# EAGLE board lis331_breakout-v10 (EAGLE 6.2)
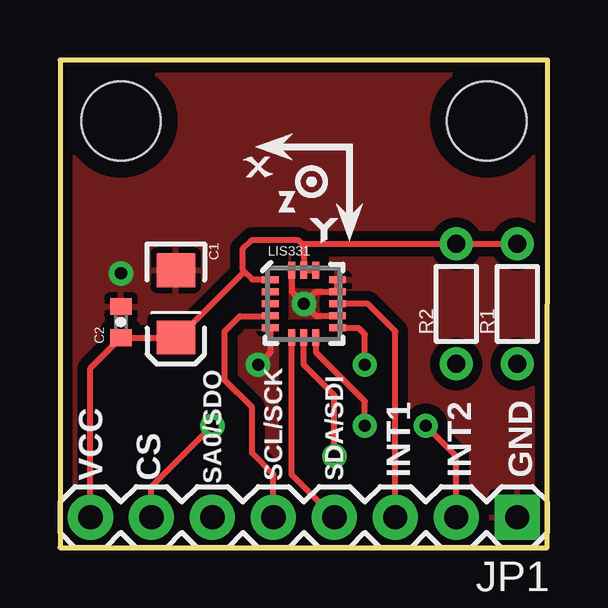
[diagram p0: board, top side]
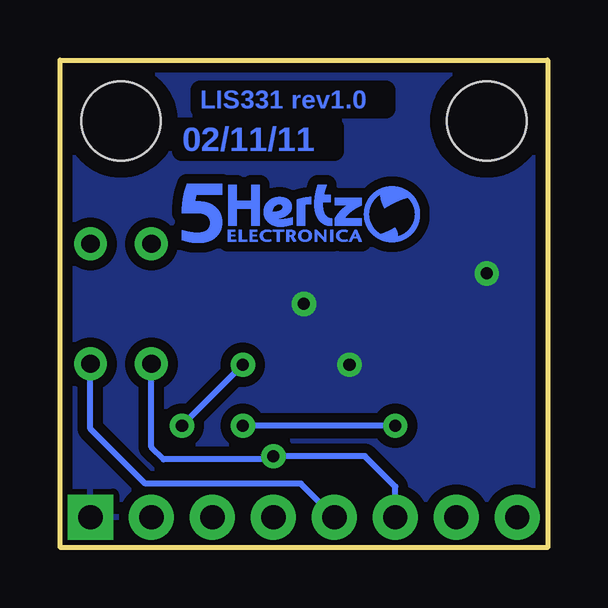
[diagram p1: board, bottom side, seen from below]

Size 20.32 x 20.32 mm. Coordinates in mm from the lower left corner, seen from the top.
Outline: 0,0 20.3,0 20.32,20.32 0,20.32 0,0
Copper layers (1*16): Top 0.035mm / dielectric 1.5mm / Bottom 0.035mm
Design rules: minimum track width 8mil, minimum drill 20mil, track to track 8mil, track to pad 8mil, pad to pad 8mil, via to via 8mil, smd to smd 8mil, copper to edge 10mil, drill to drill 8mil, minimum pad ring 12mil, minimum via ring 10mil, stop-mask expansion 4mil, vias tented up to drill 25mil, thermal gap 10mil

## Footprints (pad centres in the part's own frame; a part is rotated, then mirrored left to right if it is on the bottom)
EIA3216 = smd 1.4 x 1.6: A 1.4,0; C -1.4,0
0402-CAP = smd 0.7 x 0.9: 1 -0.65,0; 2 0.65,0
1X08 = drill 1.016 pad 1.88 square: 1 0,0 | drill 1.016 pad 1.88: 2 2.54,0; 3 5.08,0; 4 7.62,0; 5 10.16,0; 6 12.7,0; 7 15.24,0; 8 17.78,0
STAND-OFF = hole 3.302: 0,0
LGA16-3MM = smd 0.7 x 0.28: 1 -1.4,1; 2 -1.4,0.5; 3 -1.4,0; 4 -1.4,-0.5; 5 -1.4,-1; 9 1.4,-1; 10 1.4,-0.5; 11 1.4,0; 12 1.4,0.5; 13 1.4,1 | smd 0.28 x 0.7: 6 -0.5,-1.4; 7 0,-1.4; 8 0.5,-1.4; 14 0.5,1.4; 15 0,1.4; 16 -0.5,1.4
1/6W-RES = drill 0.762: 1 -2.5,0; 2 2.5,0

## Placement (x,y rotation side)
C1  10uF  [EIA3216]  4.83,10.16 270 top
C2  0.1uF  [0402-CAP]  2.54,9.4 90 top
JP1  [1X08]  19.05,1.27 180 top
JP3  STAND-OFF  [STAND-OFF]  2.54,17.78 0 top
JP4  STAND-OFF  [STAND-OFF]  17.78,17.78 0 top
LIS331  43003  [LGA16-3MM]  10.16,10.16 0 top
LOGO1  LOGO_5HZH_COOPER_10MM  [5HZ_LOGO_H_COOPER_10MM]  15.24,12.7 0 bottom
R1  4.7k  [1/6W-RES]  19.05,10.16 90 top
R2  4.7k  [1/6W-RES]  16.51,10.16 90 top
U$1  EJES_CARTESIANO_5MM_ESPEJO  [EJE_CARTESIANNO_5MM_ESPEJO]  7.62,12.7 0 top

## Library data of the parts
C1 C2 JP1 JP3 JP4 LIS331 R1 R2 = SparkFun
LOGO1 = 5hz-electronica
U$1 = PEDRO

## Nets
CS: JP1.7 LIS331.8
GND: C1.C C2.2 JP1.1 LIS331.5 LIS331.10 LIS331.12 LIS331.13 LIS331.16
INT1: JP1.3 LIS331.11
INT2: JP1.2 LIS331.9
MOSI: JP1.6 LIS331.7 R2.1
SCL: JP1.5 LIS331.4 R1.1
SDA: JP1.4 LIS331.6
VCC: C1.A C2.1 JP1.8 LIS331.1 LIS331.14 LIS331.15 R1.2 R2.2

## Tracks (layer width: path | path; a pad name or v marks a point on that pad's centre or on a via)
CS  (via drill 0.51)
  Top 0.254: JP1.7 3.81,2.54 v6.35,5.08 | v12.7,5.08 12.7,6.1 10.67,8.13 LIS331.8
  Bottom 0.254: v6.35,5.08 v12.7,5.08
GND  (via drill 0.51)
  Top 0.254: LIS331.16 9.65,10.67 v10.16,10.16 | LIS331.5 8.76,8.12 v8.26,7.62 | LIS331.10 10.66,9.66 v10.16,10.16 | v10.16,10.16 10.66,10.66 LIS331.12 LIS331.13
  other vias: 2.54,11.43
  pour Top (isolate 0.406): 0,20.32 0,0 20.32,0 20.32,20.32
  pour Bottom (isolate 0.406): 0,20.32 0,0 20.32,0 20.32,20.32
INT1
  Top 0.254: JP1.3 13.97,9.02 12.83,10.16 LIS331.11
INT2  (via drill 0.51)
  Top 0.254: JP1.2 16.51,3.81 v15.24,5.08 | v12.7,7.62 12.7,8.89 12.45,9.14 11.58,9.14 LIS331.9
  Bottom 0.254: v15.24,5.08 v12.7,7.62
MOSI  (via drill 0.51)
  Top 0.254: v11.43,3.81 11.43,6.35 10.16,7.62 LIS331.7
  Bottom 0.254: JP1.6 6.35,2.54 7.62,3.81 v11.43,3.81 11.56,3.68 16,3.68 16.51,4.19 R2.1
N$1  (via drill 0.51)
  other vias: 12.7,7.62
SCL
  Top 0.254: LIS331.4 7.49,9.65 6.86,9.02 6.86,6.99 8,5.84 8,3.94 8.89,3.05 JP1.5
  Bottom 0.254: R1.1 19.05,4.95 16.76,2.67 10.29,2.67 JP1.5
SDA
  Top 0.254: LIS331.6 9.65,3.05 JP1.4
VCC
  Top 0.254: 7.68,11.49 7.62,11.56 7.62,12.45 8,12.83 9.91,12.83 10.1,12.64 | 7.68,11.49 8,11.18 8.74,11.18 LIS331.1 | LIS331.14 LIS331.15 10.16,12.57 10.1,12.64 | JP1.8 1.27,7.48 C2.1 5.07,8.75 C1.A 5.08,8.89 7.68,11.49 | R1.2 R2.2 10.12,12.66 10.1,12.64

## Text on the board
Bottom: LIS331 rev1.0 | 02/11/11
tPlace: VCC | CS | SA0/SDO | SCL/SCK | SDA/SDI | INT1 | INT2 | GND